# Altium PCB RT_SUPER_C2.PCBdoc (part 2 of 2)
Units mil, origin at the board's own origin, x right, y up, seen from the top; angles counter-clockwise.
Board outline 1450 x 1450 mil, 4 copper layers (Top Layer, GND, PWR, Bottom Layer), stack 39.556 mil thick; 167 components, 118 nets, 494 pads, 207 vias.
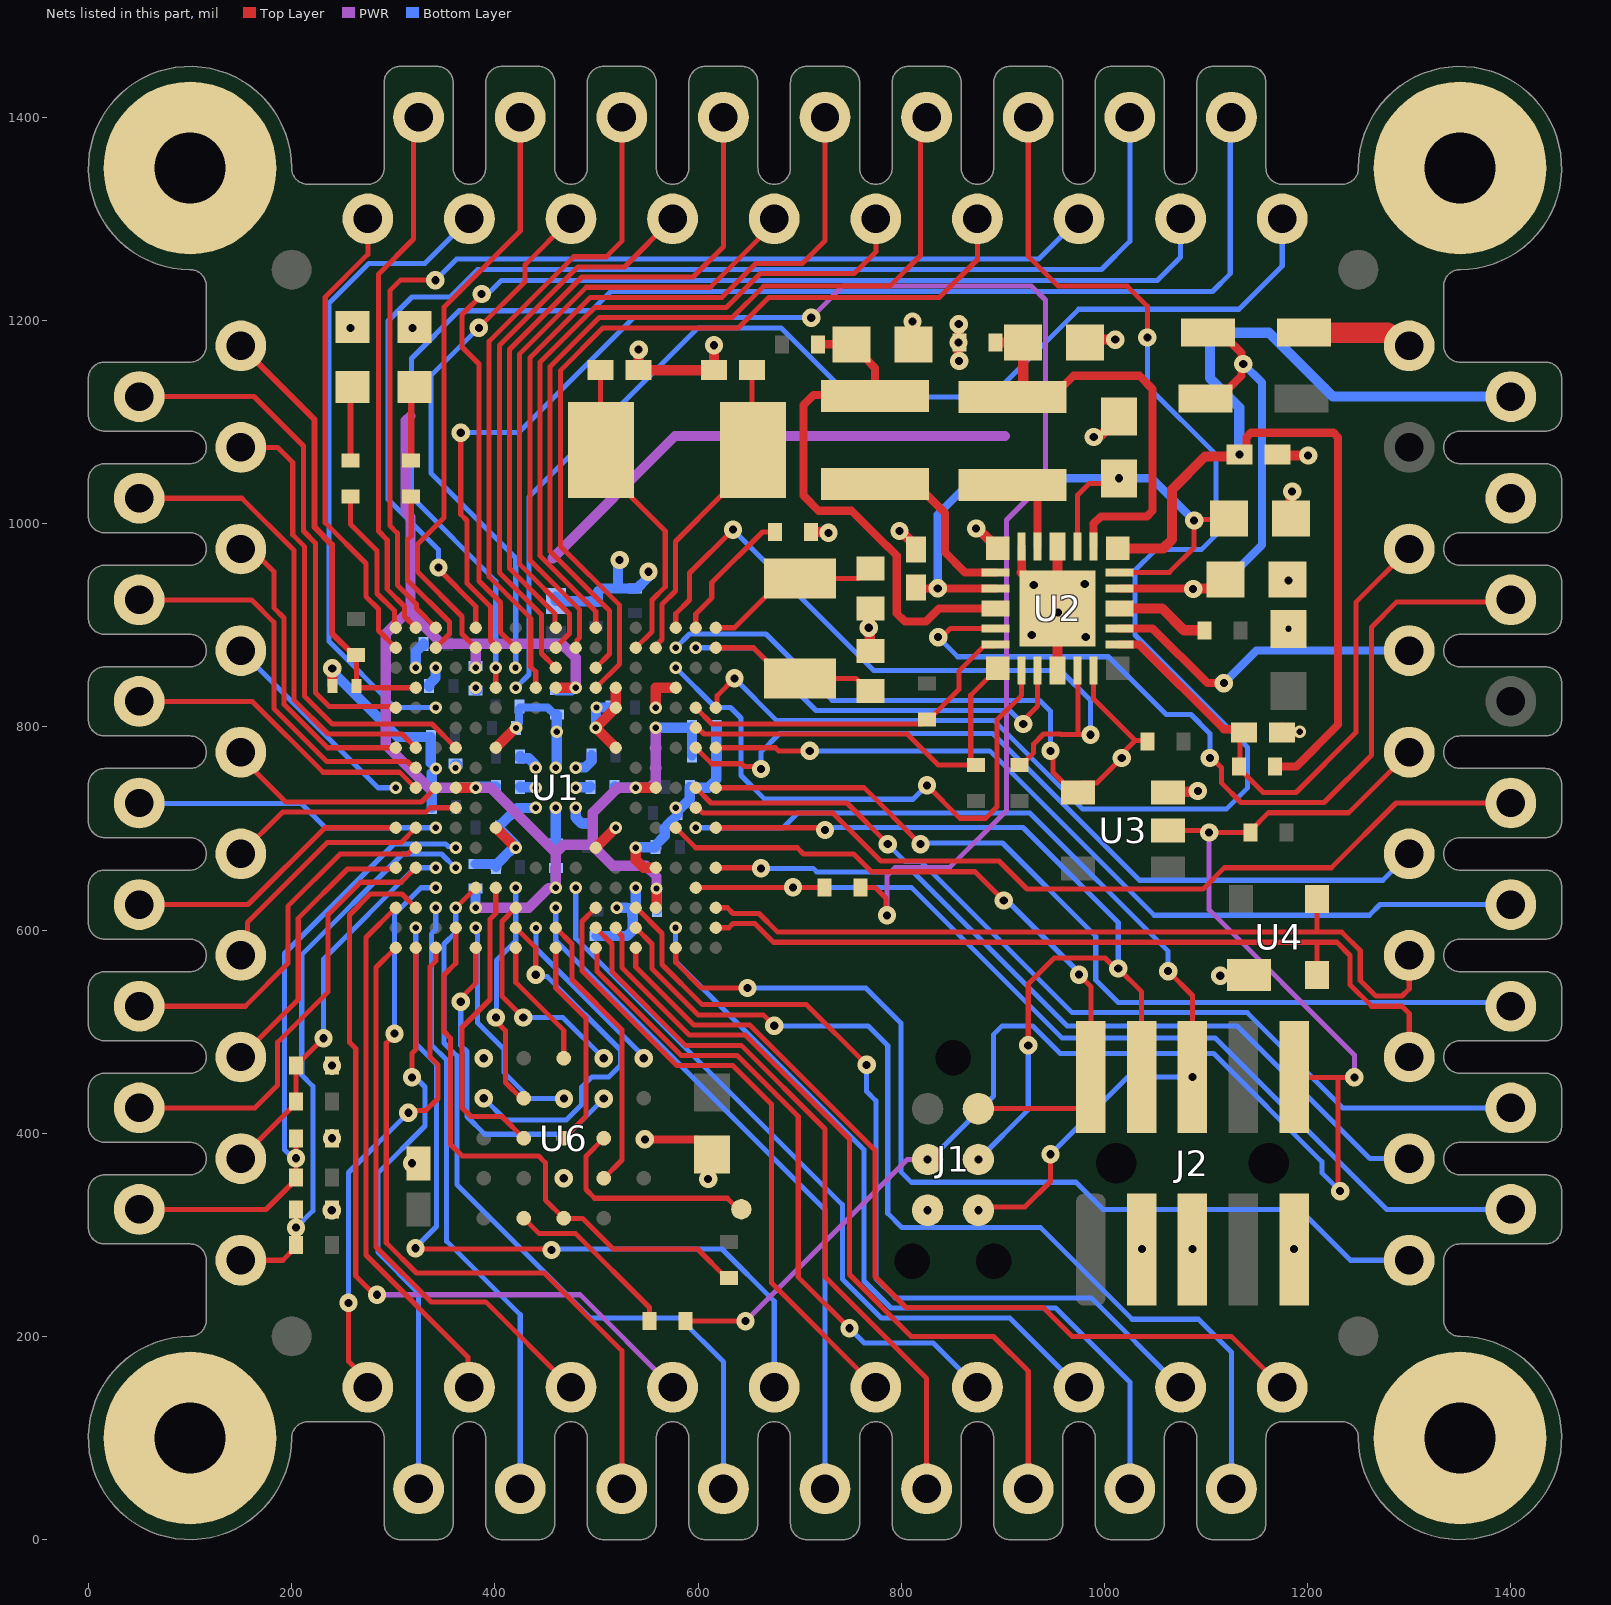
[diagram p3: the nets of this part, all layers, seen from the top]

## Via types
v1: diameter 18, hole 8, Top Layer to Bottom Layer, tented both sides, 124 vias
v2: diameter 12, hole 6, Top Layer to Bottom Layer, tented both sides, 83 vias

## Nets (pads, with @x,y where several pads share a name; then routed paths per layer and width w, separated by ;. In a path a pad name is that pad's centre, name@x,y a point inside that pad or via, vN(x,y) a via of type N, cw(c..) or ccw(c..) an arc to the next point about the centre after c; other vN are vias at no path point) (continued)
+VBATT: C4.2 R6.2 T56.1 U2.18 | length 1114.7
  Top Layer w8: v1(1132.78,1068.11) 1135.73,1068.11 1139.69,1072.07 1139.69,1084.81 1144.37,1089.49 1225.31,1089.49 1230,1084.81 1230,802.04 1188.97,761.01 R6.2@1168.04,761.01
  Top Layer w10: U2.18@1013.03,975.67 1057.89,975.67 1066.66,984.43 1066.66,1033.58 1099.07,1065.99 1130.65,1065.99 v1(1132.78,1068.11)
  Bottom Layer w10: v1(1132.78,1068.11) 1132.78,1114.28 1103.8,1143.25 1103.8,1182.08 1109.66,1187.94 1162.06,1187.94 1225,1125 T56.1@1400,1125
+VBATT_BU: C3.2 R6.1 T53.1 U2.13 | length 539.7
  Top Layer w5: C3.2@1133.59,792.87 1133.59,761.99 R6.1@1132.6,761.01 1132.6,759.04 1156.22,735.42 1188.56,735.42 1247.49,794.35 1247.49,922.49 T53.1@1300,975
  Top Layer w8: U2.13@1015,881.18 1033.9,881.18 1117.41,797.66 1128.73,797.66 1130.84,795.55 C3.2@1130.84,792.87
+VIN: D1.1 T57.1 | length 109.1
  Top Layer w20: D1.1@1196.24,1188 1278.88,1188 1291.88,1175 T57.1@1300,1175
+VREF: C6.2 R21.2 T1.1 U1.D2 | length 442
  Top Layer w5: R21.2@263.36,870.55 264.04,869.86 C6.2@264.04,840.39 266.01,838.43 U1.D2@322.2,838.43
  Top Layer w6: T1.1@150,1175 222.62,1102.38 222.62,996.51 239.72,979.42 239.72,892.22 261.39,870.55 R21.2@263.36,870.55
ADC0_1: T74.1 U1.E3 | length 637.4
  Bottom Layer w5: v2(341.89,818.89) 302.04,818.89 236.83,884.09 236.83,1216.83 276,1256 331,1256 T74.1@375,1300
ADC0_3: T75.1 U1.A2 | length 534.2
  Top Layer w5: U1.A2@322.2,897.48 311.18,908.5 311.18,918.36 294.09,935.46 294.09,983.96 285.41,992.63 285.41,1245.41 320.07,1280.07 320.07,1395.07 T75.1@325,1400
ADC0_4: T73.1 U1.B5 | length 587.7
  Top Layer w5: U1.B5@381.26,877.8 367.76,891.3 367.76,908.63 324.09,952.3 324.09,979.91 350,1005.82 350,1213 425,1288 T73.1@425,1400
ADC0_8: T2.1 U1.E1 | length 514.6
  Top Layer w5: T2.1@53,1125 162.97,1125 211.62,1076.35 211.62,1060.88 211.62,992.66 223.53,980.75 223.53,833.51 236.97,820.08 301.18,820.08 U1.E1@302.52,818.74
  Top Layer w6: T2.1@50,1125 T2.1@53,1125
ADC0_12: T76.1 U1.B1 | length 468.3
  Top Layer w5: T76.1@275,1300 275,1265 233.12,1223.12 233.12,1000.86 273.16,960.82 273.16,928.1 285.41,915.85 285.41,894.9 U1.B1@302.52,877.8
DM_MCU: T43.1 U1.T17 U4.2 | length 813.6
  Top Layer w5: U1.T17@617.48,602.2 630.22,602.2 634.37,606.35 655.93,606.35 674.35,587.93 1207.78,587.93 ; U4.2@1209.37,555.63 1209.37,586.33 1207.78,587.93 ; T43.1@1300,475 1300,517.9 1292.9,525 1263,525 1241.79,546.21 1241.79,575 1228.86,587.93 1207.78,587.93
DP_MCU: T45.1 U1.R17 U4.3 | length 804.1
  Top Layer w5: U1.R17@617.48,621.89 628.82,621.89 634.37,616.35 660.07,616.35 678.49,597.93 1209.37,597.93 ; U4.3@1209.37,630.44 1209.37,597.93 ; T45.1@1300,575 1300,542.1 1292.9,535 1267.14,535 1251.79,550.36 1251.79,579.86 1233.72,597.93 1209.37,597.93
FC0_CLK: T5.1 U1.G1 | length 304.2
  Top Layer w5: T5.1@150,975 160.29,975 182.5,952.79 182.5,917.12 192.5,907.12 192.5,822.12 235.25,779.37 U1.G1@302.52,779.37
FC0_RXD: T3.1 U1.G4 | length 462
  Top Layer w5: T3.1@150,1075 186.31,1075 201.12,1060.18 201.12,989.02 212.5,977.64 212.5,830.4 240.03,802.87 338.07,802.87 U1.G4@361.57,779.37
FC0_SSEL0: T6.1 U1.H2 | length 390.5
  Top Layer w5: T6.1@50,925 160.47,925 182.5,902.97 182.5,817.98 234.61,765.87 314.13,765.87 320.31,759.68 U1.H2@322.2,759.68
FC0_SSEL1: T7.1 U1.J1 | length 208.4
  Bottom Layer w5: T7.1@150,875 285,740 v2(302.52,740)
FC0_TXD: T4.1 U1.G2 | length 460.2
  Top Layer w5: T4.1@50,1025 151,1025 202.5,973.5 202.5,826.26 235.89,792.87 308.7,792.87 U1.G2@322.2,779.37
FC1_CLK: T8.1 U1.J2 | length 307.4
  Top Layer w5: T8.1@50,825 161.34,825 231.07,755.27 306.34,755.27 321.61,740 U1.J2@322.2,740
FC1_RXD: T10.1 U1.L3 | length 302
  Bottom Layer w5: T10.1@50,725 50.48,724.52 209.52,724.52 233.41,700.63 v2(341.89,700.63)
FC1_SSEL0: T9.1 U1.J3 | length 220.7
  Top Layer w5: T9.1@150,775 150,770.31 194.31,726 327.89,726 U1.J3@341.89,740
FC1_SSEL1: T12.1 U1.L1 | length 283.8
  Top Layer w5: T12.1@50,625 157.17,625 232.8,700.63 U1.L1@302.52,700.63
FC1_TXD: T11.1 U1.K4 | length 230.3
  Top Layer w5: T11.1@150,675 191,716 332.03,716 336.35,720.31 U1.K4@361.57,720.31
FC2_CLK: T62.1 U1.A3 | length 1058.5
  Top Layer w5: v1(341.51,1239.48) 341.07,1239.92 307.45,1239.92 296.63,1229.1 296.63,998.08 304.09,990.63 304.09,939.6 322.98,920.71 322.98,916.39 U1.A3@341.89,897.48
  Bottom Layer w5: v1(341.51,1239.48) 362.5,1260.47 935.47,1260.47 T62.1@975,1300
FC2_SDA: T59.1 U1.D6 | length 1353.5
  Top Layer w5: U1.D6@400.94,838.43 v2(400.94,858.11)
  Bottom Layer w5: v2(400.94,858.11) 400.94,943.4 317.97,1026.37 317.97,1162.61 364.84,1209.49 495.06,1209.49 514.04,1228.48 1106.34,1228.48 1123.84,1245.98 1123.84,1398.84 T59.1@1125,1400
FC2_SSEL0: T58.1 U1.D7 | length 1131.5
  Bottom Layer w5: v2(420.63,838.43) 433.66,851.46 433.66,1026.34 600,1192.68 681.76,1192.68 749.68,1124.76 888.48,1124.76 974.72,1211 1132.53,1211 1175,1253.47 T58.1@1175,1300
FC2_SSEL1: T60.1 U1.B7 | length 1118.8
  Top Layer w5: v1(387.04,1225.99) 387.04,1225.08 367.76,1205.8 367.76,1173.82 384.47,1157.11 384.47,943.52 405.7,922.29 405.7,892.73 U1.B7@420.63,877.8
  Bottom Layer w5: v1(387.04,1225.99) 389.52,1228.48 395.46,1228.48 406.46,1239.48 1052.2,1239.48 1075,1262.28 T60.1@1075,1300
FC2_WS: T61.1 U1.A5 | length 1222.5
  Top Layer w5: v1(344.47,956.81) 344.47,955.23 381.26,918.44 U1.A5@381.26,897.48
  Bottom Layer w5: v1(344.47,956.81) 344.47,974.39 294.87,1023.98 294.87,1199.48 318.38,1222.98 356.08,1222.98 383.1,1250 997.1,1250 1025,1277.9 T61.1@1025,1400
FC3_CLK: T72.1 U1.C7 | length 545.1
  Top Layer w5: v1(384.26,1192.68) 429.9,1238.32 429.9,1254.9 T72.1@475,1300
  Bottom Layer w5: v1(384.26,1192.68) 337,1145.42 337,1049.73 420.63,966.1 420.63,858.58 v2(420.16,858.11) ; T72.1@467.05,1292.05 T72.1@475,1300
FC3_SDA: T70.1 U1.C9 | length 562.4
  Top Layer w5: U1.C9@460,858.11 446,872.11 446,910.27 404.47,951.8 404.47,1175.41 481.74,1252.68 527.68,1252.68 T70.1@575,1300
FC3_SSEL0: T68.1 U1.B9 | length 623.4
  Top Layer w5: U1.B9@460,877.8 460,878.39 473.5,891.89 473.5,911.06 424.47,960.09 424.47,1167.13 490.02,1232.68 612.16,1232.68 675,1295.52 T68.1@675,1300
FC3_SSEL1: T69.1 U1.A9 | length 672.6
  Top Layer w5: U1.A9@460,897.48 459.43,898.05 459.43,910.98 414.47,955.95 414.47,1171.27 485.88,1242.68 595.08,1242.68 625,1272.6 T69.1@625,1400
FC3_WS: T71.1 U1.D8 | length 653.4
  Top Layer w5: U1.D8@440.32,838.43 440.32,854.22 435.39,859.14 435.39,906.74 394.47,947.66 394.47,1179.55 477.59,1262.68 509.68,1262.68 525,1278 T71.1@525,1400
FC4_CLK: T64.1 U1.D11 | length 844.3
  Top Layer w5: U1.D11@499.37,838.43 522.87,861.93 522.87,919.64 464.47,978.04 464.47,1150.56 506.59,1192.68 639.82,1192.68 669.82,1222.68 837.7,1222.68 875,1259.98 T64.1@875,1300
  PWR w5: T64.1@872.6,1300 T64.1@875,1300
FC4_SDA: T65.1 U1.C11 | length 874.7
  Top Layer w5: U1.C11@499.37,858.11 512.87,871.61 512.87,914.11 454.47,972.51 454.47,1154.7 502.45,1202.68 633.53,1202.68 664.6,1233.74 788.75,1233.74 819,1263.99 819,1394 T65.1@825,1400
FC4_SSEL0: T66.1 U1.A11 | length 692.2
  Top Layer w5: U1.A11@499.37,897.48 499.37,913.47 444.47,968.37 444.47,1158.84 498.3,1212.68 627.66,1212.68 660.98,1245.99 753.55,1245.99 775,1267.44 T66.1@775,1300
FC4_SSEL1: T63.1 U1.E17 | length 1485.5
  Top Layer w5: U1.E17@617.48,818.74 618.82,820.08 618.82,830.61 v1(635.93,847.71) ; T63.1@925,1400 925,1263.19 954.45,1233.74 1022.44,1233.74 1042.27,1213.91 v1(1042.27,1183.13)
  Bottom Layer w5: v1(635.93,847.71) 677.59,806.06 891.56,806.06 978.7,718.92 1119.93,718.92 1141.01,740 1141.01,779.57 1030.17,890.41 1030.17,954.06 1050.49,974.39 1095.39,974.39 1110,989 1110,1067.81 1042.27,1135.54 v1(1042.27,1183.13)
FC4_WS: T67.1 U1.B10 | length 767
  Top Layer w5: U1.B10@479.69,877.8 481.02,879.13 481.02,885.27 483.5,887.75 483.5,915.2 434.47,964.23 434.47,1162.98 494.16,1222.68 623.52,1222.68 656.84,1255.99 702.58,1255.99 725,1278.42 T67.1@725,1400
FC5_RXD: T42.1 U1.J16 | length 932.9
  Top Layer w5: U1.J16@597.8,740 612.8,725 746.61,725 786.75,684.86 v1(786.75,684.49)
  Bottom Layer w5: v1(786.75,684.49) 804,667.24 819.73,667.24 968.3,518.67 1140.66,518.67 1234.33,425 T42.1@1400,425
FC5_SCK: T47.1 U1.G16 | length 805.8
  Top Layer w5: U1.G16@597.8,779.37 613.54,763.62 643,763.62 645.68,760.95 659.51,760.95 v1(662,758.46)
  Bottom Layer w5: v1(662,758.46) 662.12,758.58 662.12,775.36 680.2,793.44 890.03,793.44 1034.48,649 1274,649 T47.1@1300,675
FC5_SSEL0: T44.1 U1.J17 | length 897.7
  Top Layer w5: U1.J17@617.48,740 763.49,740 v1(819,684.49)
  Bottom Layer w5: v1(819,684.49) 820.15,685.63 899.62,685.63 991.5,593.75 991.5,550.79 1013.62,528.67 1396.33,528.67 T44.1@1400,525
FC5_TXD: T46.1 U1.G17 | length 855.2
  Top Layer w5: U1.G17@617.48,779.37 676.11,779.37 679.11,776.37 v1(710,776.37)
  Bottom Layer w5: v1(710,776.37) 887.09,776.37 1048.96,614.5 1260.74,614.5 1271.24,625 T46.1@1400,625
FLEXSPI0A_D0: U1.T5 U6.D3 | length 224
  Top Layer w5: U6.D3@467.87,434.37 467.87,434.13 v1(468,434)
  Bottom Layer w5: v2(381.26,602.2) 382.6,600.87 382.6,596.17 383,595.78 383,508.67 408.87,482.8 408.87,459.93 434.8,434 v1(468,434)
FLEXSPI0A_D1: U1.U5 U6.D2 | length 331.5
  Top Layer w5: v1(366.5,529.37) 366.5,532.89 381.26,547.65 U1.U5@381.26,582.52 ; v1(507.24,434) U6.D2@507.24,434.37
  Bottom Layer w5: v1(366.5,529.37) 366.5,486.49 372.63,480.35 372.63,416.41 390.05,399 472.24,399 v1(507.24,434)
FLEXSPI0A_D2: U1.P6 U6.C4 | length 303.5
  Top Layer w5: U1.P6@400.94,641.57 400.94,616.35 395.2,610.6 395.2,531.53 367.76,504.09 367.76,425.03 376.45,416.35 407.16,416.35 U6.C4@428.5,395
FLEXSPI0A_D3: U1.P7 U6.D4 | length 228.2
  Top Layer w5: v1(401,514) 401,510.48 410.56,500.92 410.56,449.87 426.06,434.37 U6.D4@428.5,434.37
  Bottom Layer w5: v1(401,514) 401.57,514.57 401.57,570.18 420.63,589.24 v2(420.63,641.57)
FLEXSPI0A_D4: U1.T7 U6.D5 | length 359.4
  Top Layer w5: U1.T7@420.63,602.2 440.32,582.52 v1(440.32,556)
  Bottom Layer w5: v1(389.13,434.37) 410.49,413.02 470.35,413.02 485.38,428.05 485.38,445.32 495.48,455.42 512.26,455.42 523.74,466.91 523.74,482.01 451.7,554.05 442.26,554.05 v1(440.32,556)
FLEXSPI0A_D5: U1.U7 U6.E3 | length 128.3
  Top Layer w5: U1.U7@420.63,582.52 420.63,548.48 467.87,501.23 U6.E3@467.87,473.74
FLEXSPI0A_D6: U1.R7 U6.E2 | length 218
  Top Layer w5: U1.R7@420.63,621.89 407.13,608.39 407.13,534.87 v1(428,514)
  Bottom Layer w5: v1(428,514) 466.98,514 v1(507.24,473.74)
FLEXSPI0A_D7: U1.T8 U6.E1 | length 174.2
  Top Layer w5: U1.T8@440.32,600.31 U1.T8@440.32,602.2
  Bottom Layer w5: v2(440.44,602.07) 440.44,581.76 546.61,475.59 v1(546.61,473.74)
FLEXSPI0A_DQS: U1.U9 U6.C3 | length 208.9
  Top Layer w5: U1.U9@460,582.52 460,542.85 489.69,513.17 489.69,416.81 U6.C3@467.87,395
FLEXSPI0A_SCK: U1.T9 U6.B2 | length 281.1
  Top Layer w5: U1.T9@460,602.2 475.87,586.33 475.87,551.2 525.24,501.83 525.24,373.63 U6.B2@507.24,355.63
FLEXSPI0A_SS0_N: R9.1 U1.T4 U6.A3 | length 570.5
  Top Layer w5: U1.T4@361.57,602.2 361.57,567.21 350,555.63 350,500.05 356.5,493.55 356.5,388.97 367.76,377.7 443.05,377.7 449.76,370.99 449.76,334.38 U6.A3@467.87,316.26 486.34,316.26 516.6,286 599.59,286 628.31,257.28 R9.1@630.28,257.28
FLEXSPI0B_CLK: T20.1 U1.U3 | length 493.4
  Top Layer w5: v1(256,233) 256,175.52 275,156.52 T20.1@275,150 ; v1(314.88,420.16) 317.2,422.48 332.34,422.48 344.11,434.25 344.11,467.3 336.35,475.06 336.35,563.91 341.89,569.45 U1.U3@341.89,582.52
  Bottom Layer w5: v1(256,233) 256,361.28 v1(314.88,420.16) ; T20.1@273.5,151.5 T20.1@275,150
GND: C1.1 C2.2 C3.1 C4.1 C5.2 C6.1 C7.1 C8.2 C9.1 C10.1 C11.1 C12.1 C13.1 C14.1 C15.1 C16.1 C17.1 C18.1 C19.1 C20.1 C21.1 C22.1 C23.1 C24.1 C25.1 C26.1 C27.1 C28.1 C29.1 C30.1 C31.1 C32.1 C33.1 C34.1 C35.1 C36.1 C37.1 C38.1 C39.1 C40.1 C41.1 C42.2 C43.2 C44.2 C45.2 D3.C D4.C J1.5 J2.3 J2.5 J2.9 pad.2 R1.1 R15.1 R17.1 R18.1 T54.1 U1.C2 U1.C3 U1.D5 U1.D12 U1.D15 U1.E12 U1.E14 U1.F7 U1.F11 U1.G6 U1.G12 U1.H8 U1.H9 U1.H10 U1.J8 U1.J10 U1.K8 U1.K9 U1.K10 U1.L6 U1.L12 U1.M7 U1.M11 U1.M13 U1.N14 U1.P13 U2.9 U2.21 U2.23 U2.24 U2.25 U3.3 U4.1 U6.B3 U6.C1 U6.E5 | length 2098.9
  Top Layer w8: U6.C1@546.61,395 v1(547.64,393.97) 599.83,393.97 613.54,380.26 C42.2@613.54,379.27 611.42,377.15 611.42,356.48 610,355.06 v1(610,355) ; U2.25@918.61,951.98 U2.23@918.61,977.57
  Top Layer w10: v1(239.5,324.15) 239.72,324.37 R18.1@239.72,325 ; C6.1@240.04,840.39 v1(240.03,857.56) ; v1(258,1192.68) 258.67,1193.35 D3.C@259.93,1193.35 ; v1(318.95,1192.68) 319.62,1193.35 D4.C@320.87,1193.35 ; U1.G6@400.94,779.37 U1.F7@420.57,799 ; U1.L6@401.49,700.63 U1.L6@400.94,700.63 v2(420.63,680.94) ; U1.F7@420.63,799.06 420.94,799.06 v2(421,799) ; U1.M11@499.37,680.94 v2(519.06,700.63) ; U1.G12@519.06,779.37 v2(499.37,799.06) U1.E12@519.06,818.74 U1.E12@519.06,818.74 519,838.37 U1.D12@519.06,838.43 ; v2(538.74,680.94) 538.74,669.13 546.61,661.26 U1.N14@558.43,661.26 ; v1(541.57,1171.27) C19.1@541.57,1151.02 C11.1@615.67,1151.02 v1(615.67,1175.54) ; v2(558.43,818.74) 558.43,838.43 U1.D15@578.11,838.43 ; R1.1@711.23,991.78 727.65,991.78 v1(728.51,990.92) ; C44.2@770,874.45 769.02,875.43 769.02,896.5 v1(768.03,897.48) 768.03,914.67 C45.2@770,916.64 ; v1(798.4,992.76) 799.42,992.76 814.47,977.72 C8.2@814.47,974.76 ; v1(811,1198.9) 811,1177.56 C9.1@812.04,1176.53 C9.1@813.02,1175.54 ; v1(873.74,995.26) 875.33,995.26 U2.24@894.92,975.67 ; U2.25@918.61,951.98 U2.25@953.98,916.61 ; U2.9@953.98,855.59 U2.25@953.98,913.06 ; U2.21@953.98,977.64 U2.25@953.98,916.61 ; v1(954.45,912.58) U2.25@953.98,913.06 ; C7.1@981.09,1178.11 984.04,1181.06 v1(1010.62,1181.06) ; v1(989.54,1085.17) 991.07,1086.7 996.54,1086.7 1014.48,1104.64 C5.2@1014.48,1105.62 ; J2.3@1036.67,285.42 1036.67,285.67 v1(1037,286) ; U3.3@1062.72,735.42 1063.43,736.13 1091.26,736.13 v1(1091.96,736.83) ; J2.5@1086.67,285.42 v1(1086.67,286.09) ; v1(1114,555) 1115.07,553.93 1140.68,553.93 U4.1@1142.37,555.63 ; C4.1@1174.11,1068.11 1175.11,1067.11 v1(1200.52,1067.11) ; C3.1@1174.93,794.35 C3.1@1178.86,794.35 ; C3.1@1174.93,799.19 1178.86,795.26 C3.1@1178.86,794.35 ; C1.1@1179.99,945.11 1181,944.1 v1(1181,944) ; C18.1@1181,896.04 v2(1181,896.53) ; C18.1@1181.24,896.28 C18.1@1181.98,897.02 ; C2.2@1183.4,1005.11 1183.4,1030.31 v1(1184.77,1031.68) ; J2.9@1186.67,285.42 v1(1186.67,286.09) ; v2(1192.22,795.12) 1191.46,794.35 C3.1@1178.86,794.35 ; U2.25@953.98,913.06 U2.25@953.98,916.61
  Bottom Layer w5: C38.1@329.89,879.76 C38.1@329.89,879.92
  Bottom Layer w8: v2(421,799) 421,800.97 423.69,803.66 423.69,818.2 424.61,819.12 451.91,819.12 459.03,812 C34.1@461,812
  Bottom Layer w10: v1(240.03,857.56) 236.78,857.56 304.34,790 C16.1@337,790 337,764.54 ; v2(322.2,858.11) 322.2,873.91 328.14,879.84 329.81,879.84 329.89,879.92 C38.1@329.89,881.73 ; C39.1@335.41,840 335.41,841.81 341.51,847.91 341.51,857.73 v2(341.89,858.11) ; C40.1@337.92,720.86 338,720.94 C40.1@338,721.16 338,754.45 342,758.46 v2(342,759) ; C30.1@361.08,763 C30.1@363.05,763 ; C33.1@380.99,835.71 C33.1@382.8,835.71 ; C32.1@382.81,665 C32.1@381,665 C32.1@381,665 399.89,664.92 C24.1@401,663.81 ; C24.1@401,662 C24.1@401,663.81 ; C29.1@425,741 425.5,740.5 439.82,740.5 v2(440.32,740) ; C21.1@425,771 425,769.19 425.08,769.11 433.38,769.11 439.93,762.56 439.93,760.07 v2(440.32,759.68) ; v2(440.32,720.31) 439.93,719.93 422.12,719.93 405,702.81 C20.1@405,701 405,699.19 420.25,683.94 420.25,681.33 v2(420.63,680.94) 420.25,680.56 417.61,680.56 408.87,671.82 408.87,671.68 C24.1@401,663.81 ; C27.1@460,685.26 v2(460,720.31) ; v2(460,759.68) 460,760.23 460.98,761.21 v2(460.98,795.12) C34.1@461,812 ; C10.1@460,924.06 460,927.99 464.42,923.57 482,923.57 482.32,923.26 498.95,923.26 499.03,923.18 C36.1@499.57,923.18 ; v2(479.69,720.31) 479.69,710.61 485.54,704.76 C15.1@492.48,704.76 ; v2(479.69,740) 480.19,740.5 493.5,740.5 C28.1@494,741 ; v2(479.69,759.68) 479.93,759.93 489.14,759.93 495,765.78 C22.1@495,772 ; v2@498.95,800.01 499.37,799.6 v2(499.37,799.06) 499.69,799.37 499.69,818.68 v2(500,819) C41.1@514,819 ; C12.1@500,594 529.93,594 535.79,599.86 535.79,617.92 535.6,618.11 C31.1@535.6,619.92 C31.1@535.6,621.73 ; C36.1@501.46,923.26 501.46,933.04 504.47,936.06 C37.1@538,936.06 539.81,936.06 549.72,945.96 549.72,951.07 v1(551.25,952.6) ; v2(520.04,621.89) 529.74,621.89 529.82,621.81 535.52,621.81 C31.1@535.6,621.73 ; 521.34,936.06 521.34,962.7 v1(522.87,964.23) ; v2(538.74,641.57) 538.74,624.87 C31.1@535.6,621.73 ; v2(538.74,680.94) 539.23,681.44 557.74,681.44 C14.1@558.24,681.93 558.24,683.74 567.31,692.82 567.31,700.48 570.8,703.97 570.8,704.11 579.88,713.19 C23.1@579.88,715 C23.1@579.88,716.81 ; v2(578.11,720.31) 578.11,718.58 C23.1@579.88,716.81 ; C25.1@591.88,741 C25.1@591.8,740.16 ; C26.1@618.39,800 C26.1@618,800 C35.1@618,772 618,748 610,740 591.96,740 C25.1@591.8,740.16 ; C23.1@579.88,716.81 591.8,728.73 C25.1@591.8,740.16
  other v1: 826,324.15 467.87,355.63 318.41,370.42 239.72,395 239.72,466.5 389.13,473.74 981.66,888.34 928.51,890.31 930.48,939.52 980.68,940.51
  other v2: 361.4,759.63 381.26,838.43
HS_SPI_MISO: T14.1 U1.M2 | length 369.9
  Top Layer w5: T14.1@50,525 154.36,525 196.32,566.96 196.32,623.42 247.75,674.85 314.21,674.85 320.31,680.94 U1.M2@322.2,680.94
HS_SPI_MOSI: T15.1 U1.N1 | length 276.6
  Top Layer w5: T15.1@150,475 206.5,531.5 206.5,611.54 254.97,660.01 301.27,660.01 U1.N1@302.52,661.26
HS_SPI_SCK: T13.1 U1.L2 | length 239.5
  Top Layer w5: T13.1@150,575 156.4,581.4 156.4,607.5 234.91,686.02 307.59,686.02 U1.L2@322.2,700.63
HS_SPI_SSEL0: T16.1 U1.N2 | length 439.2
  Top Layer w5: T16.1@50,425 163.9,425 186.31,447.41 186.31,489.56 236,539.25 236,615.05 267.95,647 307.94,647 U1.N2@322.2,661.26
I3C0_PUR: R16.1 U1.B6 | length 1615.8
  Top Layer w5: v1(366.5,1089.49) 366.5,1009.24 372.63,1003.11 372.63,941.21 395.7,918.15 395.7,884.94 400.94,879.69 U1.B6@400.94,877.8 ; R16.1@759.72,642 774.11,642 785.18,630.93 785.18,615.23 v1(785.98,614.43)
  PWR w5: v1(711.49,1202.68) 742.81,1234 928,1234 942,1220 942,1042 903.57,1003.57 903.57,717.42 847.4,661.26 793.95,661.26 785.98,653.29 v1(785.98,614.43)
  Bottom Layer w5: v1(366.5,1089.49) 423.38,1089.49 536.86,1202.98 711.19,1202.98 v1(711.49,1202.68)
I3C0_SCL: T41.1 U1.N17 | length 799.9
  Top Layer w5: U1.N17@617.48,661.26 v1@661.02,661.26
  Bottom Layer w5: v1(662,660.68) 713.32,660.68 716.76,657.24 811.68,657.24 963.24,505.68 1130.56,505.68 1261.25,375 T41.1@1300,375
I3C0_SDA: R16.2 T40.1 U1.P16 | length 966.4
  Top Layer w5: U1.P16@597.8,641.57 598.22,642 v1(693.51,642) R16.2@724.28,642 R16.2@724.28,640.03
  Bottom Layer w5: v1(693.51,642) 809.99,642 958.47,493.51 1109.41,493.51 1277.92,325 T40.1@1400,325
ISP0: R12.1 R15.2 T17.1 U1.N3 | length 379
  Top Layer w5: T17.1@150,375 150,375.14 204.28,429.42 R12.1@204.28,431.39 R15.2@204.28,466.5 204.28,468.46 208.67,472.85 210.68,472.85 v1(231.34,493.51)
  Bottom Layer w5: v1(231.34,493.51) 231.34,571.34 321.26,661.26 v2(341.89,661.26)
ISP1: R13.1 R17.2 T18.1 U1.M4 | length 629.9
  Top Layer w5: T18.1@50,325 174.77,325 204.28,354.51 R13.1@204.28,356.48 v1(204.28,375.34) R17.2@204.28,395
  Bottom Layer w5: v1(204.28,375.34) 201.32,375.34 193,383.66 193,577 300.76,684.76 351.62,684.76 354.1,682.28 360.24,682.28 v2(361.57,680.94)
ISP2: R14.1 R18.2 T19.1 U1.N4 | length 574.8
  Top Layer w5: T19.1@150,275 191.25,275 204.28,288.03 R14.1@204.28,290 v1(204.28,307.07) R18.2@204.28,325
  Bottom Layer w5: v1(204.28,307.07) 220.85,323.64 220.85,446.34 210,457.19 210,575.69 309.07,674.76 347.48,674.76 360.98,661.26 v2(361.57,661.26)
MCLK: T48.1 U1.K16 | length 870.3
  Top Layer w5: U1.K16@597.8,720.31 599.69,720.31 605,715 732.9,715 779.91,667.99 896.35,667.99 923.9,640.44 1097.22,640.44 1118.04,661.26 1223.26,661.26 1287,725 T48.1@1400,725
NetC1_2: C1.2 D1.2 D2.2 U2.16 | length 488.8
  Top Layer w8: U2.16@1015.09,936.21 v1@1086.67,936.21 ; D2.2@1099.63,1123.21 1112.43,1123.21 1134.75,1145.54 1134.75,1155.2 v1(1136.67,1157.11) 1134.75,1159.03 1134.75,1167.8 1114.55,1188 D1.2@1101.76,1188
  Top Layer w10: v1@1086.67,936.21 v1(1087.33,935.55) ; v1@1087.33,936.3 1110.15,936.3 C1.2@1118.96,945.11
  Bottom Layer w8: v1(1087.33,935.55) 1111.55,935.55 1155,979 1155,1138.78 v1(1136.67,1157.11)
NetC2_1: C2.1 C5.1 C8.1 U2.2 U2.17 U2.20 | length 677.6
  Top Layer w5: U2.20@973.66,977.64 973.66,1028.25 984.96,1039.55 1009.43,1039.55 v1(1014.48,1044.6) ; U2.17@1015,952.05 1063.8,952.05 1088.31,976.56 v1(1088.31,1003.14) ; v1@1089.3,1004.12 1121.38,1004.12 C2.1@1122.37,1005.11
  Top Layer w8: C8.1@814.47,937.36 815.53,936.3 v1(836,936.3) U2.2@892.95,936.3
  Bottom Layer w8: v1(836,936.3) 836,1008.98 871.62,1044.6 1046.85,1044.6 v1(1088.31,1003.14)
NetC7_2: C7.2 L2.2 R7.1 U2.19 | length 444.4
  Top Layer w5: C7.2@904.99,1178.11 C7.2@920.07,1178.11
  Top Layer w8: L2.2@910.32,1124.48 L2.2@909.48,1124.48 921.22,1136.23 960.16,1136.23 969.47,1145.54 1034.49,1145.54 1047.45,1132.58 1047.45,1012.71 1041.81,1007.07 996.46,1007.07 989.41,1000.03 U2.19@989.41,977.64
  Top Layer w10: R7.1@892.72,1178.11 C7.2@904.99,1178.11 ; L2.2@904.99,1123.91 L2.2@904.99,1128.48 ; L2.2@909.48,1128.48 920.07,1139.07 C7.2@920.07,1178.11
NetC9_2: C9.2 L3.2 R10.1 U2.3 | length 534.5
  Top Layer w8: R10.1@718.05,1176.53 752,1176.53 765.71,1162.81 765.71,1161.83 774.2,1153.34 774.2,1128.48 772.14,1126.42 713.74,1126.42 703.91,1116.59 703.91,1027.53 718.74,1012.71 750.99,1012.71 785.98,977.72 786.61,977.72 795.63,968.71 795.63,911.69 803.55,903.76 824.39,903.76 837.24,916.61 U2.3@892.95,916.61
NetC11_2: C11.2 U1.B14 X2.2 | length 316.7
  Top Layer w5: U1.B14@558.43,877.8 558.43,879.69 564.61,885.87 564.61,920.61 577.75,933.75 577.75,982.51 623.04,1027.8 624.07,1027.8 654.07,1057.8 X2.2@654.07,1072.54 653.07,1073.55 C11.2@653.07,1151.02 ; C11.2@657,1151.02 C11.2@658.97,1152.99
NetC19_2: C19.2 U1.B13 X2.1 | length 311.6
  Top Layer w5: C19.2@504.17,1151.02 504.17,1072.84 534.47,1042.54 534.47,1025.92 567.75,992.63 567.75,937.89 554.61,924.75 554.61,893.67 U1.B13@538.74,877.8
NetC44_1: C44.1 U1.B17 X1.2 | length 170.2
  Top Layer w5: U1.B17@617.48,877.8 654.51,877.8 684.59,847.71 X1.2@700.34,847.71 755.4,847.71 768.03,835.08 C44.1@770,835.08
NetC45_1: C45.1 U1.A17 X1.1 | length 176.8
  Top Layer w5: U1.A17@617.48,897.48 635.93,897.48 684.59,946.14 X1.1@700.34,946.14 758.16,946.14 768.03,956.01 C45.1@770,956.01
NetD3_A: D3.A R19.1 | length 73.1
  Top Layer w6: R19.1@258,1062 258,1132.36 D3.A@259.93,1134.29
NetD4_A: D4.A R20.1 | length 73.3
  Top Layer w6: R20.1@317.73,1062.32 317.73,1131.16 D4.A@320.87,1134.29
NetL2_1: L2.1 U2.22 | length 82.2
  Top Layer w8: L2.1@909.48,1041.87 922.54,1041.87 934.29,1030.12 U2.22@934.29,977.64
NetL3_1: L3.1 U2.1 | length 178.6
  Top Layer w8: L3.1@774.2,1041.87 811.6,1041.87 843.09,1010.38 843.09,971.78 862.83,952.05 U2.1@892.95,952.05
NetR1_2: R1.2 U1.A16 | length 133.9
  Top Layer w5: U1.A16@597.8,897.48 597.8,910.94 613.54,926.69 613.54,941.96 663.36,991.78 R1.2@675.8,991.78
NetR11_2: R11.2 U6.A4 | length 173.6
  Top Layer w5: U6.A4@428.5,316.26 443.29,301.48 479.18,301.48 552.23,228.43 552.23,215.05 R11.2@552.28,215
NetR22_1: R22.1 U2.15 | length 92.2
  Top Layer w10: U2.15@1015,916.61 1056.62,916.61 1078.23,895 R22.1@1098.28,895
NetTP1_1: TP1.1 U6.C2 | length 218.7
  Top Layer w5: U6.C2@507.24,395 489.69,377.44 489.69,344.62 498.3,336 628.76,336 639.61,325.15 TP1.1@642.65,325.15
PDM_CLK01: T22.1 U1.R1 | length 526.2
  Top Layer w5: U1.R1@302.52,621.89 273.16,592.53 273.16,280.06 373.65,179.57 373.65,151.35 T22.1@375,150
PDM_CLK23: T24.1 U1.U1 | length 551.5
  Top Layer w5: U1.U1@302.52,582.52 283.16,563.16 283.16,288.03 337.19,234 391,234 T24.1@475,150
PDM_CLK45: T26.1 U1.R2 | length 794.5
  Top Layer w5: v1(284,241) 281.58,241 263.16,259.42 263.16,483.4 257,489.56 257,614.87 277.52,635.39 308.7,635.39 U1.R2@322.2,621.89
  PWR w5: v1(284,241) 484,241 T26.1@575,150
PDM_CLK67: T28.1 U1.T2 | length 792.7
  Top Layer w5: v1(321.94,286.72) 322.66,286 454.77,286 v1(455.79,284.98)
  Bottom Layer w5: v1(321.94,286.72) 321.94,287.56 342.63,308.25 342.63,467.93 322.2,488.36 v2(322.2,602.2) ; v1(455.79,284.98) 456.9,286.09 623.5,286.09 675,234.59 T28.1@675,150
PDM_DATA01: T21.1 U1.U2 | length 577.4
  Top Layer w5: v1(318.41,455) 318.41,478.61 322.2,482.4 U1.U2@322.2,582.52
  Bottom Layer w5: v1(318.41,455) 321.93,455 331.38,445.55 331.38,407.15 284.87,360.65 284.87,282.89 325,242.77 T21.1@325,50
PDM_DATA23: T23.1 U1.R3 | length 609.9
  Bottom Layer w5: v2(341.89,621.89) 341.89,600.6 337.54,596.25 337.54,487.16 352.63,472.07 352.63,293.68 425,221.32 T23.1@425,50
PDM_DATA45: T25.1 U1.P3 | length 790
  Top Layer w5: v1(301.18,497.99) 301.18,496.58 293.16,488.56 293.16,292.17 322.95,262.38 448.62,262.38 525,186 T25.1@525,50
  Bottom Layer w5: v1(301.18,497.99) 301.18,615.47 327.29,641.57 v2(341.89,641.57)
PDM_DATA67: T27.1 U1.P5 | length 769.9
  Top Layer w5: v2(361.57,621.89) U1.P5@381.26,641.57
  Bottom Layer w5: v2(361.57,621.89) 361.57,597.8 350,586.22 350,488.85 362.63,476.21 362.63,349.44 494.07,218 581.96,218 625,174.96 T27.1@625,50
PIO0_19: R19.2 U1.A1 | length 147.5
  Top Layer w5: R19.2@258,1026.57 258,999.43 284.09,973.34 284.09,931.31 301.18,914.22 301.18,898.82 U1.A1@302.52,897.48
PIO2_4: T37.1 U1.T13 | length 1004.7
  Top Layer w5: U1.T13@538.74,602.2 554.61,586.33 554.61,561.95 600.07,516.5 664.27,516.5 v1(675.04,505.72)
  Bottom Layer w5: v1(675.04,505.72) 767.27,505.72 786.75,486.24 786.75,321.12 800.8,307.07 937.27,307.07 1027.43,216.91 1092.5,216.91 1125,184.41 T37.1@1125,50
PIO2_5: T38.1 U1.U13 | length 899.2
  Top Layer w5: U1.U13@538.74,582.52 538.74,563.68 595.92,506.5 650.94,506.5 774.2,383.23 774.2,259.04 804.72,228.53 939.7,228.53 968.16,200.06 1124.94,200.06 T38.1@1175,150
PIO2_6: T39.1 U1.U15 | length 943.4
  Top Layer w5: U1.U15@578.11,582.52 578.11,568.17 603.29,543 v1(648.62,543)
  Bottom Layer w5: v1(648.62,543) 765.13,543 799.62,508.51 799.62,362.12 809.99,351.76 972.09,351.76 998.85,325 1192.22,325 1242.22,275 T39.1@1300,275
PMIC_INTB: R2.1 U1.A15 U2.10 | length 726.7
  Top Layer w5: U1.A15@578.11,897.48 578.11,911.26 591.7,924.85 591.7,951.4 v1(634.37,994.06) ; R2.1@916.38,762.45 918.35,762.45 930.38,774.48 930.38,783.2 940.04,792.87 956.78,792.87 957.4,792.25 974.14,792.25 ; U2.10@973.66,855.59 974.14,855.11 974.14,792.25 ; v1(986.31,792.25) 974.14,792.25
  Bottom Layer w5: v1(634.37,994.06) 772.95,855.48 956.89,855.48 986.31,826.06 v1(986.31,792.25)
PMIC_MODE0: U1.C15 U2.7 | length 571.3
  Top Layer w5: v1(825.31,742.41) 857.7,710.03 883.11,710.03 894.38,721.29 894.38,792.18 894.38,807.02 918.54,831.19 U2.7@918.54,855.59
  Bottom Layer w5: v2@577.99,858.23 v2(578.11,858.11) 617.1,819.12 631.89,819.12 642.37,808.64 642.37,751.99 665.63,728.73 811.64,728.73 v1(825.31,742.41)
PMIC_MODE1: U1.B16 U2.8 | length 411.9
  Top Layer w5: v1(920.07,802.87) 920.07,806.29 934.29,820.51 U2.8@934.29,855.59
  Bottom Layer w5: v2(597.8,877.8) 654.36,877.8 716.1,816.06 906.88,816.06 v1(920.07,802.87)
PMIC_ON: T52.1 U2.4 | length 870.8
  Top Layer w5: v1(836.34,888.26) 839.86,888.26 848.52,896.93 U2.4@892.95,896.93 ; v1(1103.8,769.34) 1105.75,769.34 1115.07,760.02 1115.07,744.87 1134.52,725.42 1216.19,725.42 1263,772.23 1263,898.23 1287.77,923 1398,923 T52.1@1400,925
  Bottom Layer w5: v1(836.34,888.26) 855.6,869 1003.97,869 1060.89,812.08 1085.17,812.08 1103.8,793.44 v1(1103.8,769.34)
PMIC_RESETN: R5.1 U1.B15 U2.11 U3.4 | length 674.2
  Top Layer w5: v1(946.88,776.37) 949.37,773.88 949.37,755.27 969.22,735.42 U3.4@974.14,735.42 ; U3.4@974.93,742.41 977.25,744.73 992.49,744.73 v1(1017.1,769.34) ; U2.11@989.41,855.59 989.41,827.49 1030.3,786.6 ; v1@1017.45,769.34 1017.45,773.2 1021.73,777.49 1021.73,778.03 1030.3,786.6 ; R5.1@1042.25,785.41 1041.06,786.6 1030.3,786.6
  Bottom Layer w5: v2(578.11,877.8) 591.61,891.3 666.91,891.3 732.15,826.06 936.11,826.06 946.88,815.29 v1(946.88,776.37)
PMIC_SCL: R3.1 U1.E16 U2.5 | length 343.9
  Top Layer w5: U1.E16@597.8,818.74 613.67,802.87 816.03,802.87 ; 816.05,802.89 820.93,802.89 R3.1@825.31,807.28 ; R3.1@826.5,806.5 856.67,836.67 856.67,854.74 881.67,879.74 891.52,879.74 U2.5@892.95,881.18
PMIC_SDA: R4.1 U1.F16 U2.6 | length 399
  Top Layer w5: U1.F16@597.8,799.06 599.69,799.06 605.87,792.87 805.91,792.87 836.34,762.45 R4.1@872.85,762.45 ; R4.1@873.74,762.45 R4.1@872.85,762.45 ; U2.6@894.92,857.56 868.46,831.1 868.46,766.84 R4.1@872.85,762.45
RED_LED: R20.2 U1.B3 | length 173.3
  Top Layer w5: R20.2@317.73,1026.88 317.73,987.69 314.09,984.05 314.09,944.37 355.39,903.07 355.39,891.3 U1.B3@341.89,877.8
RST_3V3: J1.3 J2.10 R8.1 R11.1 T49.1 U3.2 | length 1618.6
  Top Layer w5: R11.1@587.72,215 v1(646.79,215) ; U3.2@1062.72,698.02 1101.11,698.02 v1(1103.08,696.05) R8.1@1143.95,696.05 1143.95,698.02 1161.35,715.42 1240.42,715.42 T49.1@1300,775 ; J2.10@1186.67,455.42 1187.09,455 1230,455 ; v1(1232,343) 1230,345 1230,455 ; v1(1246,455) 1230,455
  PWR w5: v1(646.79,215) 805.94,374.15 v1(826,374.15) ; v1(1103.08,696.05) 1103.08,619.92 1246,477 v1(1246,455)
  Bottom Layer w5: v1(826,374.15) 828.45,374.15 891,436.7 891,497.34 899.39,505.72 929.1,505.72 956.21,478.62 1107.38,478.62 1214,372 1214,361 v1(1232,343)
SD_CLK: T34.1 U1.P10 | length 780.1
  Top Layer w5: T34.1@975,150 T34.1@975,159.36
  Bottom Layer w5: v2(479.69,641.57) 479.69,591.9 742,329.58 742,256.59 780.59,218 907,218 T34.1@975,150
SD_CMD: T29.1 U1.R9 | length 681.7
  Bottom Layer w5: v2(460,621.89) 460,589.67 725,324.67 T29.1@725,50
SD_D0: T30.1 U1.R11 | length 629.5
  Top Layer w5: U1.R11@499.37,621.89 485.87,608.39 485.87,559.9 579.27,466.5 634.37,466.5 672.25,428.61 672.25,252.75 T30.1@775,150
SD_D1: T31.1 U1.T11 | length 719.4
  Top Layer w5: U1.T11@499.37,602.2 515.24,586.33 515.24,558.81 587.56,486.5 642.65,486.5 725,404.15 725,258.71 825,158.71 T31.1@825,50
SD_D2: T32.1 U1.U11 | length 660.2
  Top Layer w5: U1.U11@499.37,582.52 500.71,581.18 500.71,559.2 583.41,476.5 638.51,476.5 698.66,416.35 698.66,258.34 v1(749,208)
  Bottom Layer w5: v1(749,208) 763.31,193.69 831.31,193.69 T32.1@875,150
SD_D3: T33.1 U1.T12 | length 800.1
  Top Layer w5: U1.T12@519.06,602.2 519.06,600.31 525.24,594.13 525.24,562.95 591.7,496.5 646.79,496.5 749,394.29 749,260.84 809.84,200 890.91,200 925,165.91 T33.1@925,50
SD_DETECT_N: T36.1 U1.R13 | length 867.5
  Top Layer w5: U1.R13@538.74,621.89 539.33,621.89 564.61,596.61 564.61,566.09 604.21,526.5 706.8,526.5 v1(766,467.3)
  Bottom Layer w5: v1(766,467.3) 766,440.95 775,431.95 775,257 794,238 987,238 T36.1@1075,150
SD_RESET_N: T35.1 U1.T15 | length 832.4
  Bottom Layer w5: v2(577.99,602.2) 577.99,569.01 763.31,383.69 763.31,254.55 789.86,228 952.05,228 1025,155.05 T35.1@1025,50
SWCLK: J1.4 J2.4 U1.L17 | length 894.9
  Top Layer w5: U1.L17@617.48,700.63 722.87,700.63 v1(725,698.5) ; v1(925,486.49) 925,546.97 950.58,572.55 1000.61,572.55 1010.94,562.22 v1(1013.62,562.22) 1036.67,539.17 J2.4@1036.67,455.42
  Bottom Layer w5: v1(725,698.5) 727.49,700.99 919.97,700.99 1013.62,607.33 v1(1013.62,562.22) ; v1(876,374.15) 925,423.15 v1(925,486.49)
SWIO: J1.2 J2.2 U1.L15 | length 698.3
  Top Layer w5: U1.L15@578.11,700.63 597.74,681 697.76,681 703.91,674.85 753.22,674.85 770.7,657.37 872.57,657.37 v1(900.9,629.05) ; J1.2@876,424.15 974.67,424.15 986.67,436.15 J2.2@986.67,455.42 986.67,544.38 v1(975,556.05)
  Bottom Layer w5: v1(900.9,629.05) 904.03,629.05 975,558.08 v1(975,556.05)
SWO: J1.6 J2.6 U1.L16 | length 941.5
  Top Layer w5: v1(876,324.15) 879.39,327.53 921.91,327.53 946.88,352.5 v1(946.88,379.27) ; v1(1062.72,559.5) 1086.67,535.55 v1(1086.67,455.42)
  Bottom Layer w5: v2(597.8,700.63) 683.54,700.63 697.91,715 926.84,715 1062.72,579.12 v1(1062.72,559.5) ; v1(946.88,379.27) 1023.03,455.42 v1(1086.67,455.42)
TEMP_SENSE: T51.1 U2.14 | length 320.6
  Top Layer w8: U2.14@1015,896.93 1047.45,896.93 1101.36,843.02 v1(1117.52,843.02)
  Bottom Layer w8: v1(1117.52,843.02) 1149.5,875 T51.1@1300,875
VDD_CORE: C26.2 C27.2 C28.2 C29.2 C30.2 C31.2 C32.2 C33.2 C34.2 C35.2 R7.2 U1.C5 U1.D9 U1.F14 U1.J4 U1.J14 U1.P9 U1.R5 U1.R14 | length 2013.5
  Top Layer w10: U1.J4@361.57,740 v2(381.26,740) ; U1.D9@458.93,838.43 U1.D9@460,838.43 v2(479.69,838.43) ; v2(538.74,740) 556.35,740 556.67,740.32 U1.J14@556.67,740.68 ; U1.R14@558.43,621.89 558.81,622.27 558.81,623.69 559,623.88 v2(559,641) ; R7.2@855.31,1178.11 R7.2@855.31,1180.08 ; v1(856.28,1178.26) 856.28,1160.03 v1(856.98,1160.03) ; v1@856.67,1193.35 856.98,1193.04 R7.2@856.98,1178.93 ; R7.2@856.98,1178.32 R7.2@856.98,1178.93 ; R7.2@857,1178.34 857.28,1178.62 R7.2@856.98,1178.93
  PWR w10: 316.98,1105.84 312.37,1101.23 312.37,1010.86 316.98,1006.25 316.98,915.88 ; v2(381.26,621.89) 433.43,621.89 452.73,641.19 459.62,641.19 v2(460,641.57) 460,676.02 ; v2(381.26,858.11) 381.26,881.73 ; 456.98,965.84 577.36,1086.22 902.17,1086.22 ; v2(479.69,838.43) 479.69,867.95 465.91,881.73 381.26,881.73 ; v2(558.43,799.06) 558.43,745.86 552.57,740 v2(538.74,740) 521.02,740 496.42,715.39 496.42,684.88 495.43,683.9 ; v2(559,641) 559.06,641.06 559.06,652.75 548.58,663.23 516.1,663.23 495.43,683.9 ; 316.98,915.88 321,911.87 321,908.32 347.58,881.73 381.26,881.73 ; 316.98,915.88 292.68,891.57 292.68,782.32 335,740 v2(381.26,740) 396.02,740 460,676.02 ; 460,676.02 467.87,683.9 495.43,683.9
  Bottom Layer w10: C30.2@361.08,740 361.16,740.08 369.13,740.08 369.44,740.38 380.88,740.38 v2(381.26,740) 382.34,740 383.34,741 C29.2@401,741 ; C33.2@380.28,859.64 381.26,858.65 v2(381.26,858.11) ; C33.2@380.71,859.79 380.79,859.71 C33.2@380.99,859.71 ; C32.2@380.99,641 380.91,640.92 381.13,640.92 381.13,622.02 v2(381.26,621.89) v2@381.26,622.43 ; v2(460,641.57) C27.2@460,661.26 ; C34.2@461,836 C34.2@461,836 475.29,835.92 477.41,838.04 479.3,838.04 v2(479.69,838.43) ; C28.2@518,741 519,740 v2(538.74,740) ; v2(558.43,799.06) 593.06,799.06 C26.2@594,800 C35.2@594,772 ; v2(559,641) 559,640.46 559.6,639.86 C31.2@559.6,619.92
  other v1: 856.67,1196.35
pads on no net: F1.1 F2.1 F3.1 F4.1 F5.1 F6.1 F7.1 F8.1 J1.A J1.B J1.C J2.7 J2.8 J2.A J2.A_1 U1.A7 U1.B2 U1.C1 U1.E2 U1.F4 U1.G3 U1.G15 U1.J15 U1.M14 U1.N15 U1.T1 U1.T3 U1.T16 U1.U16 U1.U17 U3.1 U6.A2 U6.A5 U6.B1 U6.B5 U6.C5

## Polygon pours and split planes (outlines as drawn)
+3v3 on PWR "+3V3_L03_P003" (solid, remove dead copper, pour order 3): -149.25,-63 1504,-63 1504,1494 -149.25,1494
VDD_CORE on PWR "VDD_CORE_L03_P002" (solid, remove dead copper, pour order 2): 358.62,599.25 358.62,728.19 252.32,728.19 252.32,1208 907.83,1208 907.83,1080 574.17,1080 574.17,937.83 574.17,600.24
GND on GND "GND_L02_P000" (solid, remove dead copper, pour order 0): -393.35,1621.89 -393.35,-191.1 1565,-191.1 1565,1621.89
GND on Bottom Layer "GND_L04_P004" (solid, remove dead copper, pour order 4): -134,1585 -134,-207 1504,-207 1504,1585

## Keep-outs
Keep-Out Layer:
  the board outline again, w1

## Silkscreen, mask and mechanical layers (free items; w line width, h text height)
Top Overlay:
  drawing of 240 lines, arcs and shapes, not listed
  text "59" at 1102,1332 h50
  text "76" at 249,1232 h50
  text "58" at 1150,1232 h50
  text "1" at 188,1159 h50
  text "2" at 88,1109 h50
  text "40" at 1316,309 h50
  text "39" at 1218,260 h50
  text "20" at 253,187 h50
  text "21" at 304,86 h50
Bottom Overlay:
  drawing of 240 lines, arcs and shapes, not listed
  text "Super Monkey" at 686,1115 h125
  text "RT685 Audio Platorm" at 703.83,1030.5 h75
  text "M" at 1216,824 h700
  text "REV C" at 1081,692 h175
  text "W" at 624,344 h400
  text "2022-01-06" at 617,287 h80
[8] Board Outline:
  drawing of 480 lines, arcs and shapes, not listed